# Altium PCB LED_PCB.PcbDoc (part 3 of 4)
Units mil, origin at the board's own origin, x right, y up, seen from the top; angles counter-clockwise.
Board outline 8000 x 4000 mil, 2 copper layers (Top Layer, Bottom Layer); 187 components, 303 nets, 1415 pads, 387 vias.
Unrouted connection lines stored in the file: 1.
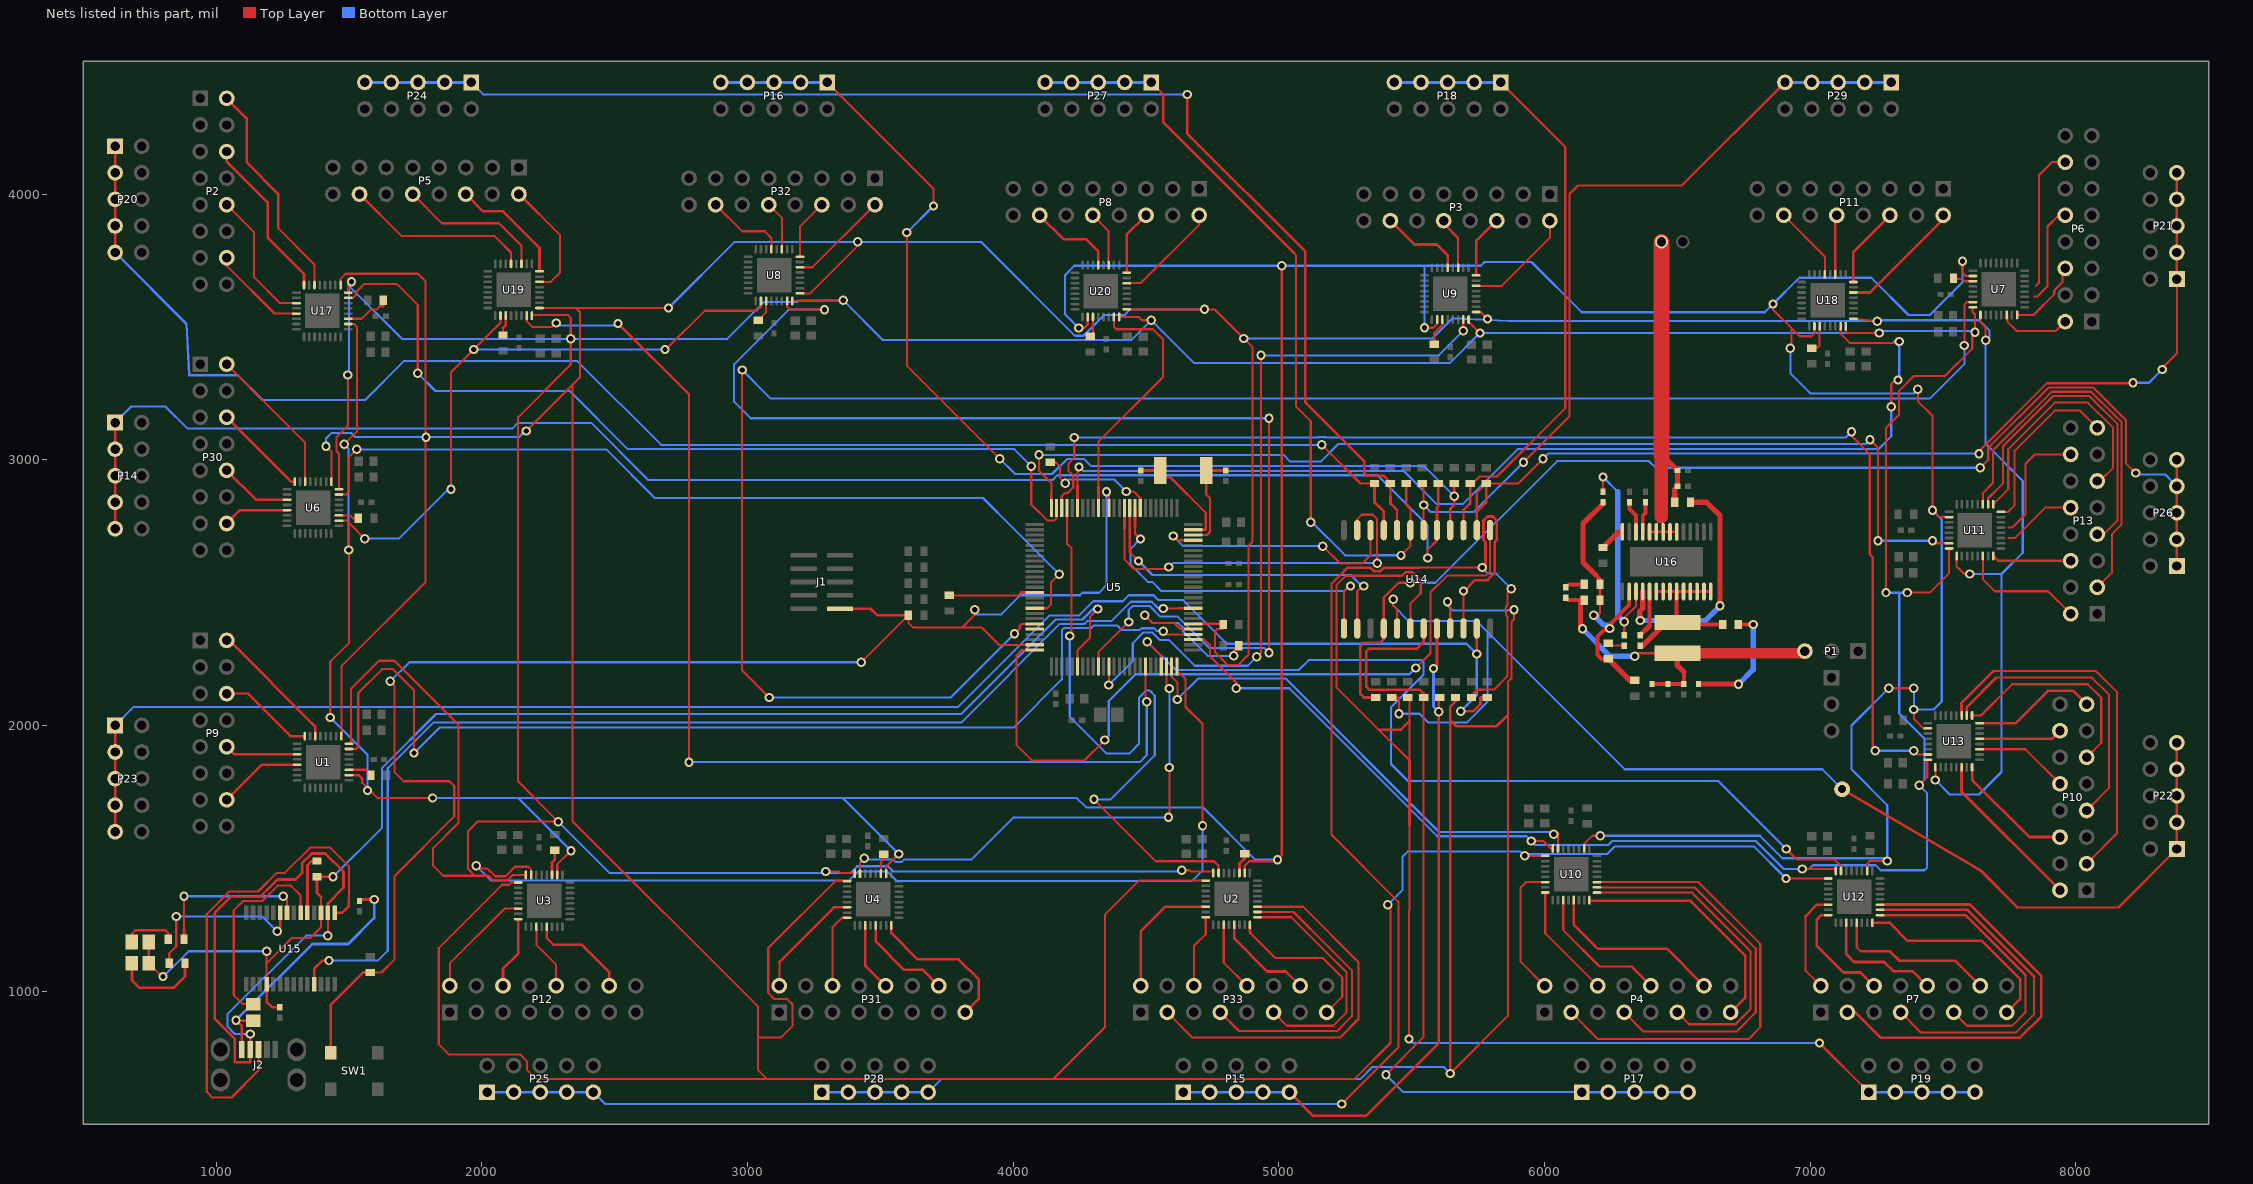
[diagram p3: the nets of this part, all layers, seen from the top]

## Via types
v1: diameter 35, hole 20, Top Layer to Bottom Layer, 371 vias
v2: diameter 25.98, hole 12.99, Top Layer to Bottom Layer, tented top, 12 vias
v3: diameter 89, hole 89, Top Layer to Bottom Layer, 4 vias

## Nets (pads, with @x,y where several pads share a name; then routed paths per layer and width w, separated by ;. In a path a pad name is that pad's centre, name@x,y a point inside that pad or via, vN(x,y) a via of type N, cw(c..) or ccw(c..) an arc to the next point about the centre after c; other vN are vias at no path point) (continued)
LED_GREEN_43: P31.15 U4.16 | length 575.1
  Top Layer w10: U4.16@3541.65,1247.56 3541.65,1218.35 3640,1120 3795,1120 3870,1045 3870,970 P31.15@3820,920
LED_GREEN_44: P33.3 U2.19 | length 1516.9
  Top Layer w8: P33.3@4580,920 4675,825 5230,825 5300,895 5300,1109.01 5091.3,1317.72 4967.29,1317.72 U2.19@4919.69,1317.72
  Top Layer w10: U2.19@4919.69,1318.03 4966.97,1318.03 4967.29,1317.72
LED_GREEN_45: P33.7 U2.18 | length 1166.4
  Top Layer w8: P33.7@4780,920 4850,850 5220,850 5275,905 5275,1078.28 5188.28,1165 5055.25,1298.03 4956.97,1298.03 U2.18@4919.69,1298.03
LED_GREEN_46: P33.11 U2.17 | length 888
  Top Layer w8: U2.17@4919.69,1278.35 5046.65,1278.35 5180,1145 5255,1070 5255,920 5205,870 5030,870 P33.11@4980,920
LED_GREEN_47: P33.15 U2.16 | length 632.6
  Top Layer w8: U2.16@4891.14,1249.8 4891.14,1220.13 4891.38,1219.89 4986.34,1124.93 5165.07,1124.93 5235,1055 5238.53,1051.47 5238.53,978.53 P33.15@5180,920
  Top Layer w10: 4891.38,1219.89 U2.16@4891.38,1249.8
LED_GREEN_48: P4.3 U10.19 | length 1796.5
  Top Layer w8: P4.3@6100,920 6200,820 6768,820 6812,864 6812,1178 6579.53,1410.47 U10.19@6197.44,1410.47
LED_GREEN_49: P4.7 U10.18 | length 1487.8
  Top Layer w8: U10.18@6197.44,1390.79 6564.21,1390.79 6795,1160 6795,920 6723,848 6372,848 P4.7@6300,920
LED_GREEN_50: P4.11 U10.17 | length 1204
  Top Layer w8: U10.17@6197.44,1371.1 6553.9,1371.1 6775,1150 6775,932.03 6718.44,875.47 6544.53,875.47 P4.11@6500,920
LED_GREEN_51: P4.15 U10.16 | length 911.4
  Top Layer w10: U10.16@6168.9,1342.56 6168.9,1340 6550,1340 6755,1135 6755,975 P4.15@6700,920
LED_GREEN_52: P7.3 U12.19 | length 1671
  Top Layer w8: U12.19@7262.44,1325.47 7281,1325.47
  Top Layer w10: P7.3@7140,920 7170,920 7265,825 7790,825 7870,905 7870,1056.57 7600.7,1325.87 7283.13,1325.87
LED_GREEN_53: P7.7 U12.18 | length 2072.1
  Top Layer w8: U12.18@7262.44,1305.79 7592.5,1305.79 7842.5,1055.78 7842.5,912.5 7775,845 7415,845 P7.7@7340,920
  Top Layer w10: U12.18@7262.44,1305.87 7592.42,1305.87 7592.5,1305.79 7842.5,1055.78
LED_GREEN_54: P7.11 U12.17 | length 1733.7
  Top Layer w8: U12.17@7262.44,1286.1 7583.9,1286.1 7584.13,1285.87 7810,1060 7810,920 7760,870 7590,870 P7.11@7540,920
  Top Layer w10: U12.17@7262.44,1285.87 7584.13,1285.87 7810,1060
LED_GREEN_55: P7.15 U12.16 | length 789.9
  Top Layer w10: U12.16@7233.9,1257.56 7297.44,1257.56 7365,1190 7645,1190 7790,1045 7790,970 P7.15@7740,920
LED_GREEN_56: P10.3 U13.19 | length 1625.8
  Top Layer w8: U13.19@7569.53,2037.44 7569.53,2084.53 7690,2205 8075,2205 8155,2125 8155,1595 P10.3@8040,1480
  Top Layer w10: U13.19@7569.21,2037.44 7569.21,2084.21 7569.53,2084.53 7690,2205
LED_GREEN_57: P10.7 U13.18 | length 1299
  Top Layer w8: U13.18@7589.21,2037.44 7589.21,2069.21 7700,2180 8060,2180 8125,2115 8125,1765 P10.7@8040,1680
  Top Layer w10: U13.18@7589.21,2037.44 7589.21,2069.21 7700,2180
LED_GREEN_58: P10.11 U13.17 | length 803.5
  Top Layer w8: U13.17@7608.9,2037.44 7642.44,2037.44 7760,2155 8045,2155 8095,2105 8095,1935 8065,1905 P10.11@8040,1880
  Top Layer w10: U13.17@7608.9,2037.44 U13.17@7609.13,2037.44
LED_GREEN_59: P10.15 U13.16 | length 473.4
  Top Layer w10: U13.16@7637.44,2008.9 7773.9,2008.9 7895,2130 7990,2130 P10.15@8040,2080
LED_GREEN_60: P13.3 U11.19 | length 1503.1
  Top Layer w8: U11.19@7649.53,2832.44 7649.53,2874.53 7687.37,2912.37 7687.37,3035 7908.37,3256 8056.63,3256 8143.53,3169.1 8144.1,3169.1 8145,3170 8145,3167.63 8172,3140.63 8172,2758.69 8170,2756.69 8170,2755 8135,2720 8135,2575 P13.3@8080,2520
LED_GREEN_61: P13.7 U11.18 | length 1254.4
  Top Layer w8: U11.18@7669.21,2832.44 7669.21,2854.21 7725,2910 7725,3050 7915,3240 8050,3240 8155,3135 8156,3134 8156,2771 8105,2720 P13.7@8080,2720
LED_GREEN_62: P13.11 U11.17 | length 968.3
  Top Layer w8: U11.17@7688.9,2832.44 7745,2888.54 7745,3040 7920,3215 8045,3215 8140,3120 8140,2970 8090,2920 P13.11@8080,2920
LED_GREEN_63: P13.15 U11.16 | length 667.5
  Top Layer w8: U11.16@7717.44,2803.9 7744,2803.9 7769,2828.9 7769,3034 7920,3185 8015,3185 P13.15@8080,3120
LED_MODE: U1.26 U2.26 U3.26 U4.26 U6.26 U7.26 U8.26 U9.26 U10.26 U11.26 U12.26 U13.26 U17.26 U18.26 U19.26 U20.26 | length 20336
  Top Layer w8: v1(1430,2030) 1430,2240 1500,2310 v1(1500,2660) ; U6.26@1462.44,2770.79 1492,2770.79 1499,2763.79 ; v1(1483,3058) 1530,3105 1530,3500.79 1520,3510.79 U17.26@1497.44,3510.79 ; v1@1499,2660 1499,2763.79 ; U1.26@1500.2,1813.03 1521.97,1813.03 ; 1550,1785 1608.36,1726.64 v1(1815,1726.64) ; v1(1559.79,2703) 1499,2763.79 ; v1(1884,2889) 1884,3329.21 2070.79,3516 U19.26@2070.79,3542.56 ; U3.26@2284.21,1437.44 2284.21,1477 v1(2336,1528.79) ; v1(2690,3415) 2693,3415 2839,3561 3035,3561 3050.79,3576.79 U8.26@3050.79,3597.56 ; U4.26@3521.97,1442.44 3521.97,1469 v1(3569,1516.03) ; v1(4247,3496) 4267.79,3496 4280.79,3509 U20.26@4280.79,3537.56 ; U2.26@4871.46,1444.68 4871.46,1472 4888.46,1489 4989,1489 v1(4995,1495) 5011,1511 v1(5011,3730) ; v1(5548,3497) 5580,3497 5582,3499 5584,3499 5595.79,3510.79 U9.26@5595.79,3527.56 ; U10.26@6149.21,1537.44 6149.21,1554.21 6180,1585 v1(6210,1585) ; v1@6860,3570 6860,3565 6930,3495 ; v1(6925,3420) 6930,3425 6930,3495 ; U18.26@7015.79,3502.56 7015.79,3475.79 7005,3465 6960,3465 6930,3495 ; U12.26@7214.21,1452.44 7214.21,1479.21 7225,1490 v1(7290,1490) ; v1(7295,2140) v1(7390,2140) ; v1(7390,2060) 7390,2025 7425.79,1989.21 U13.26@7442.56,1989.21 ; v1(7405,3265) 7405,3220 7460,3165 v1(7460,2810) 7485.79,2784.21 U11.26@7522.56,2784.21 ; v1(7573,3747) 7573,3703.65 7585,3691.65 U7.26@7612.09,3691.65
  Top Layer w10: 1521.97,1813.03 1536.97,1813.03 1550,1800 1550,1785
  Bottom Layer w8: v1(1430,2030) 1570,1890 v1(1570,1755) ; v1(1483,3058) 1499,3042 v1@1499,2660 ; v1(1559.79,2703) 1688,2703 1874,2889 v1(1884,2889) ; v1@1824.64,1717 v1(1815,1726.64) 2138.15,1726.64 ; v1(1970,3415) v1(2690,3415) ; v1(2336,1528.79) 2138.15,1726.64 ; 3360.02,1725.02 v1(3569,1516.03) ; v1(4247,3496) 4195,3548 4195,3695 4230,3730 v1(5011,3730) 5760,3730 5774.23,3744.23 5950.77,3744.23 6140,3555 6829,3555 v1(6860,3586) 6959,3685 7230,3685 7370,3545 7450,3545 7573,3668 v1(7573,3747) ; v1(4995,1495) 4911,1495 4714.49,1691.51 4274.49,1691.51 4239.36,1726.64 2138.15,1726.64 ; v1(5548,3497) 5548,3727 ; v1(6210,1585) 6810,1585 6895,1500 7280,1500 v1(7290,1490) 7290,1700 7155,1835 7155,2000 v1(7295,2140) ; v1(6925,3420) 6925,3325 7000,3250 7390,3250 v1(7405,3265) ; v1(7390,2140) v1(7390,2060) 7465,2060 7495,2090 7495,2775 v1(7460,2810)
LED_RED_0: P2.2 U17.6 | length 1075.5
  Top Layer w8: P2.2@1040,4360 1115,4285 ; 1233.99,4001.01 1233.99,3871.01 1370.47,3734.53 U17.6@1370.47,3657.44
  Top Layer w10: P2.2@1040,4360 1115,4285 1115,4120 1233.99,4001.01 1233.99,3871.01
LED_RED_1: P2.6 U17.8 | length 991.3
  Top Layer w8: 1193.99,3968.99 1193.99,3836.01 1330.79,3699.21 1331.1,3698.9 U17.8@1331.1,3657.44
  Top Layer w10: P2.6@1040,4160 1040,4122.97 1193.99,3968.99 1193.99,3836.01 1330.79,3699.21 U17.8@1330.79,3657.44
LED_RED_2: P2.10 U17.11 | length 515.6
  Top Layer w8: P2.10@1040,3960 1143.53,3856.47 1143.53,3686.47 1240.47,3589.53 U17.11@1302.56,3589.53
LED_RED_3: P2.14 U17.13 | length 366.9
  Top Layer w8: P2.14@1040,3760 1040,3730.32 1220.16,3550.16 U17.13@1302.56,3550.16
LED_RED_4: P5.2 U19.6 | length 451.5
  Top Layer w8: P5.2@2140,4000 2295,3845 2295,3780 2295,3705 2259.53,3669.53 U19.6@2217.44,3669.53
LED_RED_5: P5.6 U19.8 | length 450
  Top Layer w10: P5.6@1940,4000 2005,3935 2080,3935 2217.44,3797.56 U19.8@2217.44,3708.9
LED_RED_6: P5.10 U19.11 | length 558.1
  Top Layer w8: P5.10@1740,4000 1850,3890 2065,3890 2149.53,3805.47 U19.11@2149.53,3737.44
LED_RED_7: P5.14 U19.13 | length 703.8
  Top Layer w8: P5.14@1540,4000 1698.5,3841.5 2048.66,3841.5 2055.16,3835 2110.16,3780 U19.13@2110.16,3737.44
LED_RED_8: P8.2 U20.6 | length 398.9
  Top Layer w8: U20.6@4427.44,3664.53 4479.53,3664.53 4700,3885 P8.2@4700,3920
LED_RED_9: P8.6 U20.8 | length 246.2
  Top Layer w10: U20.8@4427.44,3703.9 4427.44,3847.44 P8.6@4500,3920
LED_RED_10: P8.10 U20.11 | length 212.2
  Top Layer w8: P8.10@4300,3920 4359.53,3860.47 U20.11@4359.53,3732.44
LED_RED_11: P8.14 U20.13 | length 335.9
  Top Layer w10: P8.14@4100,3920 4190,3830 4275,3830 4320.16,3784.84 U20.13@4320.16,3732.44 U20.13@4320.16,3739.84
LED_RED_12: P11.2 U18.6 | length 513.8
  Top Layer w8: U18.6@7162.44,3629.53 7209.53,3629.53
  Top Layer w10: U18.6@7162.44,3629.53 7209.53,3629.53 7224.53,3629.53 7500,3905 P11.2@7500,3920
LED_RED_13: P11.6 U18.8 | length 308.1
  Top Layer w10: U18.8@7162.44,3668.9 7162.44,3782.44 P11.6@7300,3920
LED_RED_14: P11.10 U18.11 | length 224.8
  Top Layer w10: U18.11@7094.53,3697.44 7094.53,3914.53 P11.10@7100,3920
LED_RED_15: P11.14 U18.13 | length 286.8
  Top Layer w8: P11.14@6900,3920 7055.16,3764.84 U18.13@7055.16,3697.44
LED_RED_16: P30.2 U6.6 | length 575.9
  Top Layer w8: P30.2@1040,3360 1335.47,3064.53 1335.47,3053.58 U6.6@1335.47,2917.44
  Top Layer w10: P30.2@1040,3349.06 P30.2@1040,3360
LED_RED_17: P30.6 U6.8 | length 356.6
  Top Layer w10: P30.6@1040,3160 1282.56,2917.44 U6.8@1296.1,2917.44
LED_RED_18: P30.10 U6.11 | length 273.3
  Top Layer w10: P30.10@1040,2960 1150.47,2849.53 U6.11@1267.56,2849.53
LED_RED_19: P30.14 U6.13 | length 248.3
  Top Layer w10: P30.14@1040,2760 1090.16,2810.16 U6.13@1267.56,2810.16
LED_RED_20: P32.2 U8.6 | length 385.1
  Top Layer w8: U8.6@3197.44,3724.53 3244.53,3724.53 P32.2@3480,3960
  Top Layer w10: P32.2@3480,3955 P32.2@3480,3960
LED_RED_21: P32.6 U8.8 | length 238.6
  Top Layer w8: U8.8@3197.44,3763.9 3197.44,3869.16 3197.44,3877.44 P32.6@3280,3960
  Top Layer w10: P32.6@3280,3951.72 P32.6@3280,3960
LED_RED_22: P32.10 U8.11 | length 188.1
  Top Layer w8: P32.10@3080,3960 3129.53,3910.47 U8.11@3129.53,3792.44
LED_RED_23: P32.14 U8.13 | length 304.4
  Top Layer w8: P32.14@2880,3960 2980,3860 3065,3860 3090.16,3834.84 U8.13@3090.16,3792.44
LED_RED_24: P3.2 U9.6 | length 417.3
  Top Layer w8: U9.6@5742.44,3654.53 5839.53,3654.53 6020,3835 P3.2@6020,3900
LED_RED_25: P3.6 U9.8 | length 238.2
  Top Layer w10: U9.8@5742.44,3693.9 5742.44,3822.44 P3.6@5820,3900
LED_RED_26: P3.10 U9.11 | length 200.1
  Top Layer w8: P3.10@5620,3900 5620,3889.06 5674.53,3834.53 U9.11@5674.53,3722.44
LED_RED_27: P3.14 U9.13 | length 316.7
  Top Layer w10: P3.14@5420,3900 5510,3810 5595.32,3810 5635.16,3770.16 U9.13@5635.16,3722.44
LED_RED_28: P6.2 U7.6 | length 273.6
  Top Layer w8: U7.6@7739.06,3545 7741.82,3542.24 7741.82,3519.55 7776.43,3484.94 7924.94,3484.94 P6.2@7960,3520
LED_RED_29: P6.6 U7.8 | length 286.3
  Top Layer w8: U7.8@7778.43,3545 7840,3545 7918.47,3623.47 7918.47,3637.2 7950,3668.73 7950,3710 P6.6@7960,3720
LED_RED_30: P6.10 | length 375.3
  Top Layer w8: 7843,3615 7855.25,3615 7893,3652.75 7893,3878 7935,3920 P6.10@7960,3920
LED_RED_31: P6.14 | length 539.9
  Top Layer w8: 7850,3655 7861,3666 7861,4071 7910,4120 P6.14@7960,4120
LED_RED_32: P9.2 U1.6 | length 504.2
  Top Layer w10: P9.2@1040,2320 1050,2320 1373.23,1996.77 U1.6@1373.23,1959.68
LED_RED_33: P9.6 U1.8 | length 360.3
  Top Layer w8: P9.6@1040,2120 1120,2120
  Top Layer w10: 1120,2120 1280.32,1959.68 U1.8@1333.86,1959.68
LED_RED_34: P9.10 U1.11 | length 277
  Top Layer w10: P9.10@1040,1920 1068.23,1891.77 U1.11@1305.32,1891.77
LED_RED_35: P9.14 U1.13 | length 320.2
  Top Layer w10: P9.14@1040,1720 1172.4,1852.4 U1.13@1305.32,1852.4
LED_RED_36: P12.2 U3.6 | length 427.7
  Top Layer w8: P12.2@1880,1020 1880,1105 2085.47,1310.47 U3.6@2137.56,1310.47
LED_RED_37: P12.6 U3.8 | length 339.9
  Top Layer w8: P12.6@2080,1020 2080,1085
  Top Layer w10: P12.6@2080,1020 2080,1085 2137.56,1142.56 U3.8@2137.56,1271.1
LED_RED_38: P12.10 U3.11 | length 253.4
  Top Layer w8: U3.11@2205.47,1242.56 2205.47,1174.53 2280,1100 P12.10@2280,1020
LED_RED_39: P12.14 U3.13 | length 436.5
  Top Layer w8: U3.13@2244.84,1242.56 2244.84,1200.16 2270,1175 2325,1175
  Top Layer w10: 2270,1175 2325,1175 2375,1175 2480,1070 P12.14@2480,1020
LED_RED_40: P31.2 U4.6 | length 770.9
  Top Layer w8: P31.2@3120,1020 3120,1110 3325.47,1315.47 U4.6@3375.32,1315.47
  Top Layer w10: 3120,1110 3325.47,1315.47 U4.6@3375.32,1315.47
LED_RED_41: P31.6 U4.8 | length 290.3
  Top Layer w8: P31.6@3320,1020 3320,1240 3356.1,1276.1 U4.8@3375.32,1276.1
LED_RED_42: P31.10 U4.11 | length 410.1
  Top Layer w10: P31.10@3520,1020 3443.23,1096.77 ; 3443.23,1096.77 U4.11@3443.23,1247.56 3443.23,1096.77
LED_RED_43: P31.14 U4.13 | length 367.3
  Top Layer w10: U4.13@3482.6,1247.56 3483.23,1247.56 3483.23,1186.77 3590,1080 3660,1080 P31.14@3720,1020
LED_RED_44: P33.2 U2.6 | length 799
  Top Layer w8: P33.2@4480,1020 4480,1212 ; 4585.72,1317.72 U2.6@4724.8,1317.72
  Top Layer w10: P33.2@4480,1020 4480,1212 4480,1225 4572.72,1317.72 4704.51,1317.72
LED_RED_45: P33.6 U2.8 | length 276.9
  Top Layer w8: P33.6@4680,1020 4680,1170 4724.8,1214.8 U2.8@4724.8,1278.35
LED_RED_46: P33.10 U2.11 | length 266
  Top Layer w8: U2.11@4792.72,1249.8 4792.72,1107.28 P33.10@4880,1020
LED_RED_47: P33.14 U2.13 | length 445.1
  Top Layer w8: 4955,1072.93 5027.07,1072.93 P33.14@5080,1020
  Top Layer w10: 4832.09,1197.91 U2.13@4832.09,1249.8 ; 4832.4,1197.6 4956.07,1073.93 5026.07,1073.93 5027.07,1072.93
LED_RED_48: P4.2 U10.6 | length 508.3
  Top Layer w8: P4.2@6000,1020 5910,1110 5910,1390 5930,1410 5930.47,1410.47 5965.47,1410.47 U10.6@6002.56,1410.47
LED_RED_49: P4.6 U10.8 | length 432.9
  Top Layer w8: U10.8@6002.56,1371.1 6002.56,1217.44 P4.6@6200,1020
LED_RED_50: P4.10 U10.11 | length 628.3
  Top Layer w8: U10.11@6070.47,1342.56 6070.47,1229.53 6207,1093 6327,1093 6330,1090 P4.10@6400,1020
  Top Layer w10: 6330,1090 P4.10@6400,1020
LED_RED_51: P4.14 U10.13 | length 677.9
  Top Layer w10: U10.13@6109.84,1342.56 6109.84,1250.16 6200,1160 6460,1160 P4.14@6600,1020
LED_RED_52: P7.2 U12.6 | length 406.7
  Top Layer w8: 6981.5,1078.5 6981.5,1281.5 ; 6983,1077 P7.2@7040,1020 ; 7028.47,1325.47 U12.6@7067.56,1325.47
  Top Layer w10: 6981.5,1281.5 7025.47,1325.47 7047.26,1325.47
LED_RED_53: P7.6 U12.8 | length 426.4
  Top Layer w10: U12.8@7067.56,1286.1 7041.1,1286.1 7025,1270 7025,1170 7125,1070 7190,1070 P7.6@7240,1020
LED_RED_54: P7.10 U12.11 | length 538.8
  Top Layer w10: U12.11@7135.47,1257.56 7135.47,1140 7165.47,1110 7278.28,1110 7313.28,1075 7385,1075 ; 7318.03,1075 7385,1075 ; P7.10@7440,1020 7385,1075
LED_RED_55: P7.14 U12.13 | length 752
  Top Layer w8: U12.13@7174.84,1257.56 7174.84,1165.16 7190,1150 7300,1150 ; 7545,1115 P7.14@7640,1020
  Top Layer w10: 7300,1150 7335,1115 7545,1115 P7.14@7640,1020
LED_RED_56: P10.2 U13.6 | length 616
  Top Layer w10: U13.6@7569.53,1842.56 7569.53,1750.47 P10.2@7940,1380
LED_RED_57: P10.6 U13.8 | length 467.4
  Top Layer w10: U13.8@7608.9,1842.56 7609.53,1842.56 7609.53,1795.47 7825,1580 P10.6@7940,1580
LED_RED_58: P10.10 U13.11 | length 356.6
  Top Layer w8: U13.11@7637.44,1910.47 7669.53,1910.47 7809.53,1910.47 P10.10@7940,1780
LED_RED_59: P10.14 U13.13 | length 315
  Top Layer w10: U13.13@7637.44,1949.84 7909.84,1949.84 P10.14@7940,1980
LED_RED_60: P13.2 U11.6 | length 471.6
  Top Layer w8: U11.6@7649.53,2637.56 7649.53,2550.47 7695,2505 7895,2505 P13.2@7980,2420
LED_RED_61: P13.6 U11.8 | length 298.4
  Top Layer w10: U11.8@7688.9,2637.56 7689.53,2637.56 7707.09,2620 P13.6@7980,2620
LED_RED_62: P13.10 | length 281.5
  Top Layer w8: 7746.17,2705 7770,2705 7885,2820 P13.10@7980,2820
LED_RED_63: P13.14 | length 459
  Top Layer w8: 7746.17,2745 7760,2745 7810,2795 7810,2985 7845,3020 P13.14@7980,3020
MUX_A: U5.47 U14.10 | length 970.8
  Top Layer w8: v1(4602,2713.17) 4618,2697.17 U5.47@4678.23,2697.17 ; v1(5165,2675) 5230,2610 5315,2610 5345,2640 U14.10@5345,2735.04
  Bottom Layer w8: v1(4602,2713.17) 4640.17,2675 5147,2675 v1@5156,2666
MUX_B: U5.61 U14.11 | length 1541.1
  Top Layer w8: U5.61@4419.37,2818.23 4419.37,2624 4454.37,2589 4579,2589 v1(4586,2596) ; U14.11@5295,2735.04 5295,2776 5312,2793 5353,2793 5370,2776 v1(5370,2611)
  Top Layer w10: 4419.37,2740.63 U5.61@4419.37,2818.23
  Bottom Layer w8: v1(4586,2596) 4601,2611 v1(5370,2611)
MUX_C: U5.60 U14.14 | length 1350.6
  Top Layer w8: U5.60@4439.06,2818.23 4439.06,2651.94 v1(4472,2619) ; U14.14@5295,2364.96 5295,2505 5306,2516 v1(5320,2525)
  Top Layer w10: 4439.06,2740.94 U5.60@4439.06,2818.23
  Bottom Layer w8: v1(4472,2619) 4524.5,2566.5 5272.36,2566.5 5272.36,2564.36 5311.72,2525 v1(5320,2525)
MUX_D: U5.59 U14.13 | length 1359.1
  Top Layer w8: U5.59@4458.74,2818.23 4458.74,2722.26 v1(4479,2702) ; U14.13@5245,2364.96 5245,2505 5265,2525 v1(5270,2525)
  Top Layer w10: 4458.74,2746.26 U5.59@4458.74,2818.23
  Bottom Layer w8: v1(4479,2702) 4442,2665 4442,2605 4506.5,2540.5 4523.04,2540.5 4557.54,2506 5246,2506 5265,2525 v1(5270,2525)
NetC17_2: C17.2 U5.48 XTAL1.1 | length 378.9
  Top Layer w8: U5.48@4678.23,2716.85 4729.85,2716.85 4741,2728 4741,2854.6 4726.61,2868.99 XTAL1.1@4726.61,2960
  Top Layer w10: XTAL1.1@4726.61,2960 4763,2960 4763.31,2959.69 C17.2@4800,2959.69
NetC18_2: C18.2 U5.49 XTAL1.2 | length 437.5
  Top Layer w8: XTAL1.2@4553.39,2960 4553.39,2933 4592,2933 4725,2800 4725,2736.54 U5.49@4678.23,2736.54
  Top Layer w10: C18.2@4480,2959.69 4516,2959.69 4516.31,2960 XTAL1.2@4553.39,2960
NetC46_2: C46.2 J2.1 L2.1 | length 972.3
  Top Layer w10: v1(1075,890) v1@1076.5,888.5 ; J2.1@1097.01,780 1097.01,867.99 v1@1076.5,888.5 ; L2.1@1140,888.5 v1@1076.5,888.5 ; C46.2@1540,1339.69 1545.31,1345 v1(1595,1345)
  Bottom Layer w10: v1@1087,902 1362.54,1177.54 1497.54,1177.54 1595,1275 v1(1595,1345)
NetC50_1: C50.1 U16.26 | length 156.1
  Top Layer w8: U16.26@6343.98,2728.58 6343.98,2763.02
  Top Layer w15: C50.1@6320,2840.32 6320,2815 6343.98,2791.02 U16.26@6343.98,2728.58
NetC51_1: C51.1 U16.25 | length 116.1
  Top Layer w15: U16.25@6369.57,2728.58 6369.57,2789.57 6380,2800 C51.1@6380,2840.32
NetC52_1: C52.1 C54.2 C55.2 C56.2 L3.2 P1.3 R46.2 | length 1370.6
  Top Layer w8: C52.1@6080,2480.32 C52.1@6088.94,2471.38 ; v1(6143,2364) v1@6149.61,2370.61 ; v1@6340,2271.75 L3.2@6500,2271.75 L3.2@6558,2271.75 ; P1.3@6971.75,2271.75 P1.3@6980,2280
  Top Layer w15: C52.1@6088.94,2471.38 R46.2@6149.61,2471.38 ; C54.2@6404.13,2156.06 C55.2@6464.13,2156.06 C56.2@6524.13,2156.06 6524.13,2201
  Top Layer w20: v1@6135,2370 6135,2470.77 ; L3.2@6500,2271.75 6500,2225.13 6524.13,2201
  Top Layer w40: L3.2@6500,2271.75 P1.3@6971.75,2271.75
  Bottom Layer w20: v1(6143,2364) 6247,2260 v1(6340,2260)
NetC52_2: C52.2 R43.2 | length 74.4
  Top Layer w8: C52.2@6080,2519.69 6091.69,2531.38
  Top Layer w15: 6091.69,2531.38 R43.2@6149.61,2531.38
NetC53_1: C53.1 C57.1 U16.3 | length 816.2
  Top Layer w8: C57.1@6220,2879.68 v1(6220,2935) ; C53.1@6300,2339.68 v1(6300,2390) 6300,2405 6343.98,2448.98 U16.3@6343.98,2504.17
  Bottom Layer w8: v1(6220,2935) 6275,2880
  Bottom Layer w20: 6275,2880 6275,2415 v1(6300,2390)
NetC53_2: C53.2 R44.1 | length 63.8
  Top Layer w8: R44.1@6240,2309.53 6249.21,2300.31 C53.2@6300,2300.31
NetC57_2: C57.2 R43.1 R44.2 R46.1 R47.2 U16.2 | length 1066.7
  Top Layer w8: v1(6185,2415) 6198.28,2415 6203,2419.72 6204.72,2419.72 6210,2425 6208.66,2426.34 R46.1@6208.66,2471.38 R46.1@6208.5,2471.22 ; 6214.53,2250.47 R44.2@6240,2250.47 ; v1@6240,2375 6245,2375 v1(6245,2365) ; 6320.94,2169.53 R47.2@6340,2169.53
  Top Layer w10: R46.1@6208.66,2471.38 R43.1@6208.66,2531.38
  Top Layer w15: 6192.66,2566 6208.66,2550 ; 6214.53,2250.47 6200,2265 6200,2335 6240,2375 6318.39,2453.39 U16.2@6318.39,2504.17
  Top Layer w20: 6192.66,2566 6145,2613.66 6145,2760 C57.2@6222.66,2837.66 ; R44.2@6240,2250.47 6320.94,2169.53
  Bottom Layer w8: v1(6245,2365) v1@6245,2377.72
  Bottom Layer w20: v1(6185,2415) 6198.28,2415 6191.64,2408.36 6222.28,2377.72 v1@6245,2377.72
NetC58_1: C58.1 U16.5 | length 179.5
  Top Layer w8: 6395,2375 6395.32,2375 ; 6395,2434.68 6395.16,2434.84
  Top Layer w15: 6395,2375 6395,2434.68 ; 6395.16,2434.84 U16.5@6395.16,2504.17
  Top Layer w20: C58.1@6360,2339.68 6395.32,2375
NetC58_2: C58.2 L3.1 R45.2 U16.6 U16.7 U16.8 U16.9 U16.10 U16.11 U16.12 U16.13 U16.14 | length 712.2
  Top Layer w8: C58.2@6360,2300.31 6370.31,2300.31 ; L3.1@6458.25,2388.25 6497.52,2388.25 L3.1@6500,2388.25 L3.1@6540,2388.25 ; L3.1@6548.25,2380 L3.1@6540,2388.25 ; L3.1@6581.28,2388.25 L3.1@6540,2388.25
  Top Layer w10: U16.6@6420.75,2504.17 U16.7@6446.34,2504.17 U16.8@6471.93,2504.17 U16.9@6497.52,2504.17 U16.10@6523.11,2504.17 U16.11@6548.7,2504.17 U16.12@6574.29,2504.17 U16.13@6599.88,2504.17 U16.14@6625.47,2504.17
  Top Layer w15: L3.1@6497.52,2388.25 U16.9@6497.52,2504.17 ; L3.1@6548.25,2380 R45.2@6670.47,2380
  Top Layer w20: 6370.31,2300.31 L3.1@6458.25,2388.25
NetC59_2: C59.2 R45.1 | length 454.6
  Top Layer w8: v1@6728.94,2156.06 v1(6730,2155)
  Top Layer w15: R45.1@6729.53,2380 v1(6785,2380)
  Top Layer w20: C59.2@6579.13,2156.06 v1@6728.94,2156.06
  Bottom Layer w20: v1(6730,2155) 6785,2210 v1(6785,2380)
NetD1_2: D1.2 R38.2 | length 343.7
  Top Layer w10: D1.2@683.5,1105 683.5,1040 711.22,1012.28 840.26,1012.28 883.03,1055.06 R38.2@883.03,1105
NetD2_2: D2.2 R39.2 | length 201.5
  Top Layer w8: D2.2@683.5,1185 683.5,1216.5 696,1229 810,1229 820.47,1218.53 R39.2@820.47,1195
NetD3_3: R40.2 U15.19 | length 221.7
  Top Layer w10: U15.19@1343.98,1294.45 1343.98,1473.5 1360,1489.53 R40.2@1380,1489.53
NetL2_2: L2.2 U15.20 | length 778
  Top Layer w8: L2.2@1140,951.5 1100,951.5 1066.5,985 1066.5,1304.13 1101.79,1339.42 1175,1339.42 1175,1339.81 1232.19,1397 1281.39,1397 1318.39,1360 U15.20@1318.39,1294.45
NetR1_2: R1.2 U2.27 | length 119.1
  Top Layer w8: U2.27@4851.77,1444.68 4851.77,1470.27 4852.09,1470.59 4853.68,1472.18 4853.68,1481.6
  Top Layer w10: U2.27@4852.09,1444.68 4852.09,1470.59 4852.09,1480 4853.68,1481.6 4872.24,1500.16 R1.2@4872.24,1517.72
NetR2_2: R2.2 U1.27 | length 91.5
  Top Layer w10: U1.27@1500.2,1832.72 1562.76,1832.72 R2.2@1583.23,1812.24
NetR3_2: R3.2 U3.27 | length 97.4
  Top Layer w10: U3.27@2264.53,1437.44 2264.53,1484.53 2275,1495 R3.2@2275,1530.47
NetR4_2: R4.2 U4.27 | length 77.4
  Top Layer w8: U4.27@3502.28,1442.44 3502.28,1485.19 3512.76,1495.66 R4.2@3512.76,1515.47
NetR12_1: R12.1 U5.58 | length 505.7
  Top Layer w8: R12.1@4140,2990.47 4160,2990.47 4177.02,2973.45 4177.02,2930.98 v1(4196,2912) ; v1(4426,2880.5) 4453.93,2880.5 4478.43,2856 U5.58@4478.43,2818.23
  Top Layer w10: U5.58@4478.43,2818.23 4478.43,2856
  Bottom Layer w8: v1(4196,2912) 4209.5,2925.5 4381,2925.5 v1(4426,2880.5)
NetR13_2: R13.2 U7.27 | length 78.5
  Top Layer w8: R13.2@7539.06,3682.44 7539.06,3680.57 7571.87,3680.57 7580.47,3671.97 U7.27@7612.09,3671.97
NetR14_2: R14.2 U6.27 | length 77.4
  Top Layer w8: U6.27@1462.44,2790.47 1505.19,2790.47 1515.66,2780 R14.2@1535.47,2780
NetR15_2: R15.2 U8.27 | length 85.7
  Top Layer w8: R15.2@3040,3524.53 3070.16,3554.69 3070.47,3555 U8.27@3070.47,3597.56
NetR16_2: R16.2 U9.27 | length 105.7
  Top Layer w8: R16.2@5585,3434.53 5585,3476.79 5615.47,3507.26 U9.27@5615.47,3527.56
NetR17_2: 
NetR17_2: 
NetR17_2: 
NetR17_2: 
NetR18_2: 
NetR18_2: 
NetR18_2: 
NetR18_2: 
NetR19_2: 
NetR19_2: 
NetR19_2: 
NetR19_2: 
NetR20_2: 
NetR20_2: 
NetR20_2: 
NetR20_2: 
NetR34_2: R34.2 U5.89 | length 378.2
  Top Layer w8: R34.2@3760,2489.53 4019.05,2489.53 4029.84,2500.31 U5.89@4081.77,2500.31
  Top Layer w10: 4029.84,2500.31 U5.89@4081.77,2500.31
NetR38_1: R38.1 U15.23 | length 673.5
  Top Layer w8: R38.1@823.98,1105 823.98,1142 850,1168.02 850,1272 v1(850,1281) ; v1(1230,1225) 1241.61,1236.61 U15.23@1241.61,1294.45
  Top Layer w10: v1@841,1281 v1@850,1272
  Bottom Layer w8: v1(850,1281) 1174,1281 v1@1227.52,1227.48
NetR39_1: R39.1 U15.22 | length 639.4
  Top Layer w8: R39.1@879.53,1195 879.53,1230.53 v1(879.53,1357) ; v1(1253,1357) 1267.2,1342.8 U15.22@1267.2,1294.45
  Top Layer w10: R39.1@879.53,1195 879.53,1230.53
  Bottom Layer w8: v1(879.53,1357) v1(1253,1357)
NetR41_2: R41.2 U16.4 | length 932.5
  Top Layer w8: v1(6360,2395) 6355,2400 6360,2400 v1@6360,2405
  Top Layer w20: v1@6359.29,2409.29 6358,2410.57 6358,2428.8 6369.57,2440.36 U16.4@6369.57,2504.17 ; R41.2@6549.53,2840 6610,2840 6660,2790 v1(6660,2450)
  Bottom Layer w20: v1(6360,2395) 6355,2400 6360,2400 6360,2405 6370,2395 6605,2395 v1(6660,2450)
NetR42_1: R42.1 U16.28 | length 97.3
  Top Layer w8: 6279.05,2728.58 U16.28@6292.8,2728.58
  Top Layer w20: R42.1@6220,2669.53 6279.05,2728.58
NetR48_2: R48.2 U18.27 | length 106.3
  Top Layer w8: R48.2@7005,3420 7024,3420 7035.47,3431.47 U18.27@7035.47,3502.56
NetR49_2: R49.2 U17.27 | length 173.9
  Top Layer w8: U17.27@1497.44,3530.47 1547.94,3530.47 1582.47,3565 1603.43,3565 1616.28,3577.84 1629.53,3577.84 R49.2@1629.53,3600
NetR50_2: R50.2 U19.27 | length 129.1
  Top Layer w8: R50.2@2080,3469.53 2080,3495 2090.16,3505.16 2090.47,3505.47 U19.27@2090.47,3542.56
  Top Layer w10: 2080,3495 2090.16,3505.16 U19.27@2090.16,3542.56
NetR51_2: R51.2 U20.27 | length 77.4
  Top Layer w8: R51.2@4290,3464.53 4300.47,3475 U20.27@4300.47,3537.56
RESET: D3.1 J1.10 R9.1 SW1.1 U5.64 U5.99 | length 5752.2
  Top Layer w8: D3.1@1580,1070.47 1622.47,1070.47 1672,1120 1672,1433.5 1896.5,1658 1896.5,1772.14 1878.5,1790.14 1705.86,1790.14 1672,1824 1672,2150 v1(1656,2166) ; J1.10@3348.11,2439.21 3464,2439.21 ; v1(3428.47,2238) R9.1@3605.47,2415 3605.47,2386.56 3622.75,2369.28 3809.28,2369.28 ; v1(3855,2435) 3855,2421 3858,2418 3809.28,2369.28 ; U5.99@4081.77,2303.46 3946.54,2303.46 3880.72,2369.28 3809.28,2369.28 ; v1(4351,2880) 4360.32,2870.68 U5.64@4360.32,2818.23
  Top Layer w10: SW1.1@1431.42,768.9 1431.42,948.42 1553.47,1070.47 D3.1@1580,1070.47 ; 3464,2439.21 3488.21,2415 R9.1@3605.47,2415
  Bottom Layer w8: v1(1656,2166) 1728,2238 v1(3428.47,2238) ; v1(3855,2435) 3855,2421 3858,2418 3955.36,2418 4027.26,2489.91 4250.91,2489.91 4260.5,2499.5 4323.5,2499.5 4351,2527 v1(4351,2880)
SEL_LED_0: U1.31 U5.29 | length 4016.8
  Top Layer w8: U1.31@1500.2,1911.46 1526.46,1911.46 1535,1920 1535,2122 1625,2212 1666,2212 1745,2133 v1(1745,1896) ; v1(4565,2355) 4577.17,2342.83 U5.29@4678.23,2342.83
  Bottom Layer w8: v1(1745,1896) 1841,1992 4002,1992 4183.5,2173.5 4183.5,2358 4192,2366.5 4294.5,2366.5 4304.5,2376.5 4391.13,2376.5 4407.82,2359.81 4477.18,2359.81 4483.37,2366 4530.41,2366 4541.41,2355 v1(4565,2355)
SEL_LED_1: U3.31 U5.25 | length 3879.7
  Top Layer w8: v1(1979,1472) 1990,1461 2021.82,1461 2050.32,1432.5 2089.68,1432.5 2125.18,1468 2176,1468 2185.79,1458.21 U3.31@2185.79,1437.44 ; U5.25@4616.22,2221.77 4616.22,2195.03 4629.55,2195.03 4648.58,2176 4648.58,2069.64 4713,2005.22 v1(4713,1623)
  Bottom Layer w8: v1(1979,1472) 2034,1417 3382.92,1417 3415.92,1450 3526.59,1450 3562.59,1414 4672,1414 4713,1455 v1(4713,1623)
SEL_LED_2: U4.31 U5.23 | length 1856.6
  Top Layer w8: U4.31@3423.54,1442.44 3423.54,1483.54 v1(3440,1500) ; U5.23@4576.85,2221.77 4576.85,2150 v1(4588,2138.85) ; v1(4585,1655) 4575,1655 4588,1668 v1(4588,1842)
  Bottom Layer w8: v1@3440,1495 3548.31,1495 3556.78,1486.53 3581.22,1486.53 3589.69,1495 3842,1495 4000,1653 v1@4573,1653 ; v1(4588,1842) v1(4588,2138.85)
SEL_LED_3: U2.31 U5.72 | length 2503.3
  Top Layer w8: U5.72@4202.83,2818.23 4202.83,2684.17 4220,2667 4220,2344 v1(4213,2337) ; v1(4304,1722) 4537,1489 4756.03,1489 4773.03,1472 U2.31@4773.03,1444.68
  Bottom Layer w8: v1(4213,2337) 4213,2033 4352,1894 4437,1894 4473.5,1930.5 4473.5,2104.5 4501,2132 4513,2132 4533,2112 4533,1888 4367,1722 v1(4304,1722)
SEL_LED_4: U5.74 U17.31 | length 3338.6
  Top Layer w8: U17.31@1497.44,3609.21 1515.21,3609.21 1528.69,3622.69 1528.69,3632 1558.69,3662 1680,3662 1759,3583 v1(1759,3326) ; v1(4068,2976) 4068,2831.78 4128,2771.78 4155,2771.78 4163.46,2780.24 U5.74@4163.46,2818.23
  Bottom Layer w8: v1(1759,3326) 1826,3259 2330.74,3259 2549.74,3040 4004,3040 v1(4068,2976)
SEL_LED_5: U5.19 U19.31 | length 4218
  Top Layer w8: U19.31@2169.21,3542.56 2169.21,3520.79 2190,3500 2265,3500 v1(2280,3515) ; v1(2513,3513) 2780,3246 v1(2780,1862) ; U5.19@4498.11,2221.77 4498.11,2093.89 v1(4503,2089)
  Bottom Layer w8: v1(2280,3515) 2289.5,3505.5 2505.5,3505.5 v1(2513,3513) ; v1(2780,1862) 4476,1862 4503,1889 v1(4503,2089)
SEL_LED_6: U5.66 U20.31 | length 1057.9
  Top Layer w8: U5.66@4320.94,2818.23 4320.94,3067.94 4564.5,3311.5 4564.5,3452.5 4526,3491 4389.21,3491 4379.21,3501 U20.31@4379.21,3537.56
  Top Layer w10: U5.66@4320.94,2818.23 4320.94,2899.06
SEL_LED_7: U5.70 U18.31 | length 4129.4
  Top Layer w8: U5.70@4242.2,2818.23 4242.2,2967.2 v1(4248,2973) ; U18.31@7114.21,3502.56 7114.21,3474 7148.21,3440 v1@7335,3440 ; v1(7305,3200) 7305,3285 7320,3300 v1(7330,3300)
  Top Layer w10: U5.70@4242.2,2818.23 4242.2,2902.8
  Bottom Layer w8: v1(4248,2973) 4263.5,2957.5 5469.5,2957.5 5594,2833 5692,2833 5899,3040 7257,3040 7305,3088 v1(7305,3200) ; v1(7330,3300) 7335,3305 7335,3425 7315,3445 v1(7335,3445)
SEL_LED_8: U5.92 U6.31 | length 3245.5
  Top Layer w8: U6.31@1462.44,2869.21 1484.21,2869.21 1489.21,2869.21 1500,2880 1500,2885 1500,3010 v1(1529,3039) ; U5.92@4081.77,2441.26 4128,2441.26 4142,2455.26 4142,2536.59 v1(4174,2568.59)
  Bottom Layer w8: v1(1529,3039) 2468,3039 2651,2856 3886.59,2856 3998.8,2743.8 v1(4174,2568.59)
SEL_LED_9: U5.10 U8.31 | length 4521.9
  Top Layer w8: U8.31@3149.21,3597.56 3149.21,3576 3160.21,3565 v1(3290,3565) ; U5.10@4320.94,2221.77 4320.94,2275.94 4414.31,2369.31 v1(4435,2389.31) ; v1(4963,2274) v1(4963,3156)
  Bottom Layer w8: v1(3290,3565) 3155,3565 2950,3360 2950,3218 3012,3156 v1(4963,3156) ; v1(4435,2389.31) 4435,2435 4449.5,2449.5 4513.78,2449.5 4553.78,2409.5 4620,2409.5 4738,2291.5 4945.5,2291.5 v1(4963,2274)
SEL_LED_10: U5.12 U9.31 | length 2797.2
  Top Layer w8: v1(4360.32,2152.32) U5.12@4360.32,2221.77 ; v1(4917,2258) 4933,2274 v1(4933,3393) ; v1(5694.21,3485) U9.31@5694.21,3527.56
  Bottom Layer w8: v1(4360.32,2152.32) 4450,2242 4450,2310 4490,2350 4523.78,2350 4552.78,2321 4587,2321 4683.5,2224.5 4883.5,2224.5 v1(4917,2258) ; v1(4933,3393) 5602.21,3393 v1(5694.21,3485)
SEL_LED_11: U5.95 U7.31 | length 7354.2
  Top Layer w8: v1(2980,3338) 2980,2207 v1(3082,2105) ; v1(4005,2345) 4025,2365 4025,2375 4032.2,2382.2 U5.95@4081.77,2382.2 ; v1(7580,3430) 7580,3584 7589.23,3593.23 U7.31@7612.09,3593.23
  Bottom Layer w8: v1(2980,3338) 3088,3230 7450,3230 7580,3360 v1(7580,3430) ; v1(3082,2105) 3765,2105 v1(4005,2345)
SEL_LED_12: U5.24 U10.31 | length 1919.4
  Top Layer w8: U5.24@4596.54,2221.77 4596.54,2183.46 4618,2162 v1(4618,2098) ; v1(6035,1590) 6030,1595 6030,1599.21 6033.42,1595.79 6050.79,1595.79 U10.31@6050.79,1537.44
  Bottom Layer w8: v1(4618,2098) 4696.5,2176.5 5025.5,2176.5 5602.79,1599.21 6030,1599.21 6030,1595 v1(6035,1590)
SEL_LED_13: U5.22 U12.31 | length 3523.2
  Top Layer w8: v1(4505,2315) 4557.17,2262.83 U5.22@4557.17,2221.77 ; v1(6910,1535) 6950,1495 7092.79,1495 7115.79,1472 U12.31@7115.79,1452.44
  Bottom Layer w8: v1(4505,2315) 4611.5,2208.5 5074.5,2208.5 5112,2246 5536,2246 5545,2237 5545,2192 5422,2069 5422,1855 5486,1791 6654,1791 v1(6910,1535)
SEL_LED_14: U5.73 U13.31 | length 4683.5
  Top Layer w8: U5.73@4183.15,2818.23 4183.15,2863.15 4195,2875 4205,2875 4224,2894 4225.2,2894 ; 4226,2894 4226,2941 4208,2959 4208,2985 4230,3007 v1(4230,3084) ; v1@7147.5,3097.5 7224,3021 7224,2643.37 7235,2632.37 7235,1905 v1(7245,1905) ; v1(7390,1905) 7404.21,1890.79 U13.31@7442.56,1890.79
  Bottom Layer w8: v1(4230,3084) 5148.28,3084 5149.78,3085.5 5174.22,3085.5 5175.72,3084 7134,3084 v1(7155,3105) ; v1(7245,1905) v1(7390,1905)
SEL_LED_15: U5.75 U11.31 | length 4113.2
  Top Layer w8: v1(4097.5,3018.5) 4097.5,2958.5 4143.78,2912.22 U5.75@4143.78,2818.23 ; v1(7225,3075) 7255,3045 v1(7255,2695) ; v1(7460,2695) 7469.21,2685.79 U11.31@7522.56,2685.79
  Top Layer w10: U5.75@4143.78,2818.23 4143.78,2876.22
  Bottom Layer w8: v1(4097.5,3018.5) 5017.85,3018.5 5043.26,2993.08 5158.08,2993.08 5224,3059 7209,3059 v1(7225,3075) ; v1(7255,2695) v1(7460,2695)
SEL_LED_MODE: U5.96
SPI_CLK: U1.32 U2.32 U3.32 U4.32 U6.32 U7.32 U8.32 U9.32 U17.32 U18.32 U19.32 U20.32 | length 16273.6
  Top Layer w8: U6.32@1462.44,2888.9 1462.44,3022.56 1453.5,3031.5 1453.5,3085.19 1496,3127.69 v1(1496,3319) ; 1497.44,3657.44 U17.32@1497.44,3628.9 U17.32@1500,3628.9 ; U1.32@1500.2,1931.14 1508,1931.14 1508,2138 1613.5,2243.5 1671.5,2243.5 1912.5,2002.5 1912.5,1633.5 1817,1538 1817,1472 1854.5,1434.5 1973.98,1434.5 ; 2114.3,1434.5 2096.3,1416.5 ; U3.32@2166.1,1437.44 2117.24,1437.44 2096.3,1416.5 ; U19.32@2188.9,3547 U19.32@2188.9,3542.56 2190.84,3544.5 2325.5,3544.5 2335,3535 v1(2335,3455) 2335,3358.28 2137,3160.28 2137,1789 v1(2288,1638) 1984,1638 1948.54,1602.54 1948.54,1459.94 1973.98,1434.5 ; U8.32@3168.9,3597.56 3168.9,3598 3282,3598 3284,3600 v1(3360,3600) ; v1(3295,1450) 3344,1450 3350,1444 3403.86,1444 U4.32@3403.86,1442.44 ; U20.32@4398.9,3537.56 4472.44,3537.56 4485,3525 v1(4520,3525) ; v1(4635,1455) 4663,1455 4667,1451 4753.35,1451 U2.32@4753.35,1444.68 ; U9.32@5713.9,3527.56 5713.9,3519.83 v1(5756.72,3477) ; U18.32@7133.9,3502.56 7133.9,3477 v1(7260,3477) ; v1(7285,2500) 7285,3121 7334.5,3170.5 7334.5,3259.5 7390,3315 7506.72,3315 7609.5,3417.78 7609.5,3469.5 v1(7620,3480) 7620,3546.62 7610,3556.62 7610,3571.45 U7.32@7612.09,3573.54 ; 1973.98,1434.5 2025.7,1434.5 2043.7,1416.5 2096.3,1416.5
  Bottom Layer w8: v1@1500,3323 1500,3655 1700,3455 v1(2335,3455) 2924,3455 3063,3594 3187.28,3594 3193.28,3600 v1(3360,3600) 3510,3450 4445,3450 v1(4520,3525) 4681.5,3363.5 5643.22,3363.5 v1(5756.72,3477) v1(7260,3477) 7268,3485 7615,3485 v1(7620,3480) ; v1(2288,1638) 2482,1444 3387.29,1444 3413.29,1470 3529.22,1470 3548.22,1451 v1@4635,1451 ; v1(4635,1455) v1@4639,1451
  other v1: 1510,3670
SPI_MISO: R10.2 U5.30 | length 656.7
  Top Layer w8: v1(4495,2415) 4525,2385 4607.52,2385 4630,2362.52 U5.30@4678.23,2362.52 ; v1(4830,2262) 4830,2280.47 R10.2@4849.53,2300
  Bottom Layer w8: v1(4495,2415) 4525,2385 4621.72,2385 4639.5,2367.22 4639.5,2354.81 4732.31,2262 v1(4830,2262)
SPI_MOSI: R11.2 U1.1 U2.1 U3.1 U4.1 U5.31 U6.1 U7.1 U8.1 U9.1 U10.1 U11.1 U12.1 U13.1 U17.1 U18.1 U19.1 U20.1 | length 26281.7
  Top Layer w8: v1(1414,3051) 1433.9,3031.1 U6.1@1433.9,2917.44 ; U17.1@1468.9,3657.44 1468.9,3680.9 1488,3700 1760,3700 1789,3671 1789,2540 1471.65,2222.65 U1.1@1471.65,1959.68 ; U3.1@2137.56,1408.9 2111.33,1408.9 2102.93,1400.5 2076.6,1400.5 1838,1161.9 1838,800 1876,762 2144,762 2170,736 2170,704 2204,670 3072,670 ; v1(2167,3108) 2341.72,3282.72 ; U19.1@2217.44,3571.1 v1@2702.9,3571.1 ; 2354.45,3570.55 2370,3555 2370,3311 2341.72,3282.72 ; U8.1@3197.44,3626.1 3236.1,3626.1 3415,3805 v1(3415,3820) ; U4.1@3375.32,1413.9 3330,1413.9 3078.47,1162.37 3078.47,993.53 3102,970 3150,970 3170,950 3170,870 3125,825 3040,825 ; U20.1@4427.44,3566.1 v1(4719.9,3566.1) 4757.9,3566.1 v1(4867.5,3456.5) ; U2.1@4724.8,1416.14 4473.14,1416.14 4345,1288 4345,863 4152,670 ; R11.2@4790.47,2380 4790.47,2363.15 4768,2363.15 4760,2355.15 4760,2275 4807,2228 4848,2228 4886,2266 4886,2676.79 4901.31,2692.1 4901.31,3423.69 v1@4868,3457 ; v1(5410,1325) 5420,1315 5420,805 5285,670 4152,670 ; U9.1@5742.44,3556.1 5758.9,3556.1 v1(5785,3530) ; v1(5925,1510) 5926.1,1508.9 U10.1@6002.56,1508.9 ; v1@6905,1420 v1(6908.9,1423.9) U12.1@7067.56,1423.9 ; U18.1@7162.44,3531.1 v1(7252.1,3521.1) ; v1(7470,1795) 7471.1,1796.1 U13.1@7471.1,1842.56 ; U11.1@7551.1,2637.56 7550,2636.46 7550,2600 7580,2570 v1(7600,2570) ; U7.1@7640.63,3545 7640.63,3517.37 7660,3498 v1@7660,3445 ; 2341.72,3282.72 2341.72,1639.28 3040,941 3040,825 ; 3040,825 3040,702 3072,670 ; 3072,670 4152,670
  Top Layer w10: U5.31@4678.23,2382.2 4788.27,2382.2 R11.2@4790.47,2380
  Bottom Layer w8: v1(1414,3051) 1413.91,3051.09 1413.91,3080 1433.91,3100 1510,3100 1525,3085 v1(1790,3085) 2140,3085 2163,3108 v1(2167,3108) ; v1(2703,3571) 2952,3820 v1(3415,3820) 3879,3820 4232.5,3466.5 4264.5,3466.5 4343,3545 4420,3545 4441.1,3566.1 v1(4719.9,3566.1) ; v1(4867.5,3456.5) 5577.5,3456.5 5653.44,3532.44 5864.56,3522.44 v1(7252.1,3521.1) 7258.2,3525 7635,3525 7675,3485 7675,3460 7660,3445 v1(7660,3450) 7660,3060 7800,2920 7800,2650 7720,2570 ; v1(5410,1325) 5465,1380 5465,1505 5485,1525 5910,1525 v1(5925,1510) 5931.74,1516.74 6236.74,1516.74 6265,1545 6787.8,1545 v1(6908.9,1423.9) ; v1(7470,1795) 7525,1740 7635,1740 7720,1825 7720,2570 ; v1(7600,2570) 7720,2570
SPI_SCK: U5.28 U10.32 U11.32 U12.32 U13.32 | length 4973.8
  Top Layer w8: U5.28@4678.23,2323.15 4719.48,2323.15 4741,2301.63 4741,2260.38 4840,2161.38 v1(4840,2140) ; v1(5950,1565) 5995,1565 6022.56,1537.44 U10.32@6031.1,1537.44 ; v1(6970,1460) 7088.54,1460 U12.32@7096.1,1452.44 ; v1(7365,2500) 7450,2500 7522.56,2572.56 U11.32@7522.56,2666.1 ; v1(7410,1775) 7440.5,1805.5 7440.5,1869.04 U13.32@7442.56,1871.1
  Bottom Layer w8: v1(4840,2140) 5039.37,2140 5596.16,1583.21 5931.79,1583.21 v1(5950,1565) 5965,1550 6240,1550 6255,1565 6795,1565 6900,1460 v1(6970,1460) 6996,1460 7010,1474 7246,1474 7265,1455 7430,1455 7440,1465 7440,1745 v1(7410,1775) 7430,1795 7430,1950 7335,2045 7335,2500
  Bottom Layer w10: 7285,2500 7335,2500 v1(7365,2500)
TILE_0: P20.1 P20.2 P20.3 P20.4 P20.5 R27.1 U14.9 | length 6036.7
  Top Layer w8: v1(5162,3056) 5307.53,2910.47 R27.1@5360,2910.47 ; U14.9@5395,2735.04 5395,2784
  Top Layer w10: P20.5@620,3780 P20.4@620,3880 P20.3@620,3980 P20.2@620,4080 P20.1@620,4180 ; v1@5161.47,3056 v1@5161.74,3055.74 ; R27.1@5360,2910.47 5360,2840 5395,2805 5395,2784 U14.9@5395,2735.04
  Bottom Layer w8: P20.5@620,3780 889,3511 899,3318 1082,3318 1175,3225 1561,3225 1707,3371 2360,3371 2675,3056 4140,3056 5089,3056 ; 5089,3056 v1(5162,3056) 5089,3056
TILE_1: P24.1 P24.2 P24.3 P24.4 P24.5 R30.1 U14.8 | length 5120.7
  Top Layer w8: 5420,2860 R30.1@5420,2910.47 ; U14.8@5445,2735.04 5445,2810
  Top Layer w10: v1(4655,4375) 4655,4228.28 5100,3783.28 5100,3216 5321,2995 5321,2950 5331,2940 5393,2940 5422.53,2910.47 R30.1@5420,2910.47 ; 5420,2860 5420,2835 5445,2810
  Bottom Layer w8: P24.1@1960,4420 2005,4375 v1(4655,4375)
  Bottom Layer w10: P24.5@1560,4420 P24.4@1660,4420 P24.3@1760,4420 P24.2@1860,4420 P24.1@1960,4420
TILE_2: P27.1 P27.2 P27.3 P27.4 P27.5 R35.1 U14.7 | length 3029.9
  Top Layer w8: P27.1@4520,4420 4565,4375 ; 5060,3775 5065,3770 5065,3200 5120,3145 v1(5120,2765) ; v1(5460,2640) 5495,2675 U14.7@5495,2735.04 5495,2815 ; R35.1@5476,2910.47 R35.1@5480,2910.47
  Top Layer w10: 4565,4375 4565,4270 5060,3775 ; R35.1@5480,2910.47 5480,2830 5495,2815 ; 5495,2696 U14.7@5495,2735.04
  Bottom Layer w8: v1(5120,2765) 5125,2765 5250,2640 5357.28,2640 5357.78,2640.5 5459.5,2640.5 v1(5460,2640)
  Bottom Layer w10: P27.5@4120,4420 P27.4@4220,4420 P27.3@4320,4420 P27.2@4420,4420 P27.1@4520,4420
TILE_3: P29.1 P29.2 P29.3 P29.4 P29.5 R37.1 U14.6 | length 3117.4
  Top Layer w8: R37.1@5540,2910.47 5545,2905.47 v1(5545,2830) U14.6@5545,2735.04 ; v1(5921,2991) 6094,3164 6094,4000 6126,4032 6517,4032 P29.5@6905,4420
  Top Layer w10: v1@5545,2820 v1(5545,2830)
  Bottom Layer w8: v1(5545,2830) 5571,2804 5734,2804 v1(5921,2991)
  Bottom Layer w10: P29.5@6905,4420 P29.4@7005,4420 P29.3@7105,4420 P29.2@7205,4420 P29.1@7305,4420
TILE_4: P14.1 P14.2 P14.3 P14.4 P14.5 R21.1 U14.5 | length 6002.2
  Top Layer w8: v1(5560,2630) 5560,2661 5595,2696 U14.5@5595,2735.04
  Top Layer w10: P14.5@620,2740 P14.4@620,2840 P14.3@620,2940 P14.2@620,3040 P14.1@620,3140 ; U14.5@5595,2735.04 5595,2820 5600,2825 R21.1@5600,2910.47
  Bottom Layer w8: P14.1@620,3140 680,3200 810,3200 892.91,3117.09 2114.49,3117.09 2136.04,3138.64 2411.66,3138.64 2626.3,2924 4148.79,2924 4166.29,2941.5 5371.13,2941.5 5560,2752.63 v1(5560,2630)
TILE_5: P16.1 P16.2 P16.3 P16.4 P16.5 R23.1 U14.4 | length 4236.2
  Top Layer w8: P16.1@3300,4410 P16.1@3300,4420 3700,4020 v1(3700,3955) ; v1(3600,3855) 3600,3354 v1(3950,3004) ; U14.4@5645,2735.04 5645,2815 ; R23.1@5645,2910.47 5659,2910.47 R23.1@5660,2910.47 v1(5660,2863)
  Top Layer w10: 5645,2815 5660,2830 v1(5660,2863) ; v1@5659,2864 R23.1@5659,2910.47
  Bottom Layer w8: v1(3600,3855) v1(3700,3955) ; v1(3950,3004) 4007.74,2946.26 4146.26,2946.26 4202.5,3002.5 4267,3002.5 4292.42,2977.08 5545.92,2977.08 v1(5660,2863)
  Bottom Layer w10: P16.5@2900,4420 P16.4@3000,4420 P16.3@3100,4420 P16.2@3200,4420 P16.1@3300,4420
TILE_6: P18.1 P18.2 P18.3 P18.4 P18.5 R25.1 U14.3 | length 2382.3
  Top Layer w8: U14.3@5695,2735.04 5695,2810 ; R25.1@5720,2901 5756,2937 5821,2937 6078,3194 6078,4177 P18.1@5835,4420
  Top Layer w10: 5695,2810 5720,2835 R25.1@5720,2901
  Bottom Layer w10: P18.5@5435,4420 P18.4@5535,4420 P18.3@5635,4420 P18.2@5735,4420 P18.1@5835,4420
TILE_7: P21.1 P21.2 P21.3 P21.4 P21.5 R28.1 U14.2 | length 3878.3
  Top Layer w8: U14.2@5745,2735.04 5745,2805 5745,2875.47 R28.1@5780,2910.47 5900.47,2910.47 v1(5994,3004) ; v1(7635,3023) 7635,3032.63 7890.37,3288 8213,3288 v1(8215,3290) ; v1(8325,3340) 8320,3340 8380,3400 P21.1@8380,3680
  Top Layer w10: U14.2@5745,2735.04 5745,2805 5780,2840 R28.1@5780,2910.47 ; P21.1@8380,3680 P21.2@8380,3780 P21.3@8380,3880 P21.4@8380,3980 P21.5@8380,4080
  Bottom Layer w8: v1(5994,3004) 6013,3023 v1(7635,3023) ; v1(8215,3290) 8275,3290 v1(8325,3340)
TILE_8: P23.1 P23.2 P23.3 P23.4 P23.5 R31.1 U14.23 | length 6291.6
  Top Layer w8: 5745,2298 U14.23@5745,2364.96
  Top Layer w10: P23.5@620,1600 P23.4@620,1700 P23.3@620,1800 P23.2@620,1900 P23.1@620,2000 ; v1(5685,2054) 5733,2054 5759,2080 5759,2105.47 R31.1@5785,2105.47 ; v1(5745,2269) 5745,2298
  Bottom Layer w8: P23.1@620,2000 690,2070 3792.87,2070 4137.37,2414.5 4249.09,2414.5 4302.09,2467.5 4412.5,2467.5 4435,2490 4528.28,2490 4546.78,2471.5 4640,2471.5 4804,2307.5 5706.5,2307.5 v1(5745,2269)
  Bottom Layer w10: v1(5685,2054) 5745,2114 v1(5745,2269)
TILE_9: P25.1 P25.2 P25.3 P25.4 P25.5 R32.1 U14.22 | length 7400.8
  Top Layer w8: v1(5237,575) 5450,788 5450,1337 5198,1589 5198,2533.6 5245.71,2581.31 ; 5528.96,2593.5 5529.96,2594.5 v1(5765.5,2594.5) ; U14.22@5695,2364.96 5695,2503 v1(5695,2506) ; R32.1@5725,2105.47 R32.1@5733,2105.47 ; 5762.53,2135 5810,2135 5860,2185 5860,2410 5855.5,2414.5 5855.5,2447.22 5860,2451.72 5860,2500 v1(5875,2515)
  Top Layer w10: 5245.71,2581.31 5257.4,2593 5322.04,2593 5322.54,2593.5 5344.37,2593.5 5357.37,2580.5 5382.63,2580.5 5395.63,2593.5 5528.96,2593.5 ; v1@5695,2503 5739,2547 5786.04,2547 5812,2572.96 5812,2690.38 5819.81,2698.19 5819.81,2771.89 5805.28,2786.43 5784.72,2786.43 5770.19,2771.89 5770.19,2698.19 5778,2690.38 v1@5778,2587.04 ; R32.1@5733,2105.47 5733,2120 5748,2135 5762.53,2135
  Bottom Layer w8: P25.5@2420,620 2465,575 v1(5237,575) ; v1(5695,2506) v1@5704,2515 ; v1(5765.5,2594.5) 5788.5,2571.5 5818.5,2571.5 v1(5875,2515)
  Bottom Layer w10: P25.1@2020,620 P25.2@2120,620 P25.3@2220,620 P25.4@2320,620 P25.5@2420,620
TILE_10: P28.1 P28.2 P28.3 P28.4 P28.5 R36.1 U14.21 | length 6301.2
  Top Layer w8: v1(5635,2465) 5635,2453 5645,2443 U14.21@5645,2364.96 ; v1(5645,690) 5862,907 5862,2040 5862,2164.37 5876,2178.37 5876,2391 5885,2400 v1@5885,2434
  Top Layer w10: v1(5645,690) 5645,2020 ; R36.1@5665,2105.47 5665,2090 5645,2070 5645,2020 ; 5862,2040 5819,1997 5668,1997 5645,2020
  Bottom Layer w8: P28.5@3680,620 3729,669 5306.54,669 5352.17,714.63 5620.37,714.63 v1(5645,690) ; v1(5635,2465) 5635,2453 5655,2433 5862,2433 5864,2435 v1(5885,2435)
  Bottom Layer w10: P28.1@3280,620 P28.2@3380,620 P28.3@3480,620 P28.4@3580,620 P28.5@3680,620
TILE_11: P15.1 P15.2 P15.3 P15.4 P15.5 R22.1 U14.20 | length 2742.7
  Top Layer w10: P15.5@5040,620 5129,531 5328.35,531 5602,804.65 v1(5602,2052) 5602,2105.47 R22.1@5605,2105.47 ; v1(5582,2214) 5595,2227 U14.20@5595,2364.96
  Bottom Layer w10: P15.1@4640,620 P15.2@4740,620 P15.3@4840,620 P15.4@4940,620 P15.5@5040,620 ; v1(5582,2214) 5582,2072 v1(5602,2052)
TILE_12: P17.1 P17.2 P17.3 P17.4 P17.5 R24.1 U14.19 | length 3299.6
  Top Layer w8: v1(5403,685) 5544,826 5544,2105.47 R24.1@5545,2105.47
  Top Layer w10: R24.1@5545,2105.47 5545,2120 5530,2135 5340,2135 5329,2146 5329,2279 5339,2289 5520,2289 5545,2314 U14.19@5545,2364.96
  Bottom Layer w8: v1(5403,685) 5468,620 P17.1@6140,620
  Bottom Layer w10: P17.1@6140,620 P17.2@6240,620 P17.3@6340,620 P17.4@6440,620 P17.5@6540,620
TILE_13: P19.1 P19.2 P19.3 P19.4 P19.5 R26.1 U14.18 | length 5200
  Top Layer w8: R26.1@5485,2105.47 5492,2105.47 5492,2016 5492,1868 ; v1(5490,820) 5490,1306 5492,1308 5492,1868 ; U14.18@5495,2364.96 5495,2458 5534,2497 5534,2546 5503.5,2576.5 5476.5,2576.5 5463.5,2563.5 5251.94,2563.5 5216.44,2528 5216.44,2143.56 5376,1984 5492,1868 ; v1(7035,805) P19.1@7220,620
  Top Layer w10: 5376,1984 5460,1984 5492,2016 ; 5492,1625 5492,1868
  Bottom Layer w8: v1(5490,820) 5505,805 v1(7035,805)
  Bottom Layer w10: P19.1@7220,620 P19.2@7320,620 P19.3@7420,620 P19.4@7520,620 P19.5@7620,620
TILE_14: P22.1 P22.2 P22.3 P22.4 P22.5 pad.0 R29.1 U14.17 | length 4738.4
  Top Layer w8: R29.1@5425,2105.47 5452,2105.47 v1(5452,2044) ; v1(5430,2475) 5430,2452 5445,2437 U14.17@5445,2364.96 ; 7780,1315 8160,1315 P22.1@8380,1535
  Top Layer w10: pad.0@7120,1760 7640,1455 7780,1315 ; P22.1@8380,1535 P22.2@8380,1635 P22.3@8380,1735 P22.4@8380,1835 P22.5@8380,1935
  Bottom Layer w8: v1(5430,2475) 5430,2452 5489.4,2392.6 5744.4,2392.6 5785,2352 ; v1(5452,2044) 5529.08,2044 5561.56,2011.52 5708.48,2011.52 5785,2088.04 5785,2352 ; pad.0@7120,1760 7045,1835 6302,1835 5785,2352
TILE_15: P26.1 P26.2 P26.3 P26.4 P26.5 R33.1 U14.16 | length 4517.4
  Top Layer w8: U14.16@5395,2364.96 5395,2481.72 5450.28,2537 v1(5494,2537) v1@5479.7,2537 ; v1(7640,2970) 7670,3000 7670,3045 7897,3272 8065.63,3272 8188,3149.63 8188,2987 v1(8225,2950)
  Top Layer w10: R33.1@5365,2105.47 5320,2105.47 5307,2118.47 5307,2300 5318,2311 5380,2311 5395,2326 U14.16@5395,2364.96 ; P26.1@8380,2600 P26.2@8380,2700 P26.3@8380,2800 P26.4@8380,2900 P26.5@8380,3000
  Bottom Layer w8: v1(5494,2537) 5589.23,2537 6047.23,2995 6393,2995 6418,2970 v1(7640,2970) ; v1@8228,2945 8335,2945 P26.4@8380,2900
TILE_SENSE: U5.100 U14.1 | length 2884.7
  Top Layer w8: U5.100@4081.77,2283.78 4032,2283.78 4013,2264.78 4013,1926 4070.5,1868.5 4268.5,1868.5 v1@4346.5,1946.5 ; v1(5515.5,2216.5) 5571,2272 5571,2501 5634,2564 5779,2564 5795,2580 U14.1@5795,2735.04
  Bottom Layer w8: v1(4345,1945) 4360,1960 4360,2092.12 4460.38,2192.5 5491.5,2192.5 v1(5515.5,2216.5)
USB_CTS: U5.34 U15.11 | length 4349.8
  Top Layer w8: U15.11@1369.57,1025.55 1369.57,1059.57 ; v1(4565,2440) 4617,2440 ; 4619.74,2441.26 U5.34@4678.23,2441.26
  Top Layer w10: 1369.57,1059.57 1369.57,1084.57 1400,1115 v1(1425,1115)
  Bottom Layer w8: v1(1425,1115) 1609,1115 1646,1152 1646,1838.72 1817.89,2010.61 3804.11,2010.61 4176,2382.5 4268.5,2382.5 4278.5,2392.5 4369.87,2392.5 4442.87,2465.5 4521.63,2465.5 4545.13,2442 4563,2442 v1(4565,2440)
USBDM: J2.2 U15.16 | length 2293.7
  Top Layer w8: 1056.42,1356.42 1167.56,1356.42 1193,1381.85 ; J2.2@1128.5,780 v1(1128.5,839) ; v1(1420.75,1209) U15.16@1420.75,1294.45
  Top Layer w10: 1056.42,1356.42 995,1295 995,896.46 1071,820.46 1071,732.52 1128.5,732.52 J2.2@1128.5,780 ; 1193,1381.85 1231.65,1420.5 1299.47,1420.5 1323.98,1445.01 1323.98,1481.79 1360.5,1518.31 1410.66,1518.31 1479.53,1449.44 1479.53,1389.53 1420.75,1330.75 U15.16@1420.75,1294.45
  Bottom Layer w8: v1(1128.5,839) 1071,839 1042.5,867.5 1042.5,912.5 1339,1209 v1(1420.75,1209)
USBDP: J2.3 U15.15 | length 1874.7
  Top Layer w8: J2.3@1160,780 1160,702 1058,600 986,600 965,621 965,1290 1050,1375 1157.86,1375 1227.86,1445 1258.9,1445 1353.9,1540 1430,1540 1500,1470 1500,1348.11
  Top Layer w10: U15.15@1446.34,1294.45 1474.45,1294.45 1500,1320 1500,1348.11
V_USB: C47.2 D1.1 D2.1 R40.1 U5.6 U15.4 U15.17 | length 5025.8
  Top Layer w8: D1.1@746.5,1105 791.5,1060 795,1060 v1(800,1055) ; U15.4@1190.43,1025.55 1190.43,1105.53 ; v1(1190.43,1150) 1190.43,1105.53 ; R40.1@1380,1430.47 1439.53,1430.47 v1(1440,1430) ; 1395.16,1354 U15.17@1395.16,1294.45 1395.16,1240 1355.16,1200 1284.9,1200 1190.43,1105.53 ; U5.6@4242.2,2221.77 4242.2,2283.2 4289.9,2330.9 4289.9,2409.9 v1(4318,2438)
  Top Layer w10: D1.1@746.5,1105 D2.1@746.5,1185 ; U15.4@1190.43,1025.55 1190.43,960 1210.75,939.69 C47.2@1240,939.69 ; v1(1190.43,1150) v1@1190.43,1150.43 ; R40.1@1380,1430.47 1380,1369.16 1395.16,1354
  Bottom Layer w8: v1@800,1053 897,1150 v1(1190.43,1150) ; v1(1440,1430) 1625,1615 1625,1840.35 1827.65,2043 3804.5,2043 4160,2398.5 4261,2398.5 4300.5,2438 v1(4318,2438)
VBAT: C48.1 C49.1 J3.1 R41.1 U16.20 U16.21 U16.22 U16.23 U16.24 | length 1431
  Top Layer w8: 6439.74,2785.26 6446.34,2778.66 U16.22@6446.34,2728.58 ; 6440,3014.74 6439.74,3015 6450,3015 ; 6450,3010.32 6450,3015 ; 6455,3015 6450,3015 ; 6490.47,2890.16 C48.1@6500.32,2900
  Top Layer w10: U16.24@6395.16,2728.58 U16.23@6420.75,2728.58 U16.22@6446.34,2728.58 U16.21@6471.93,2728.58 U16.20@6497.52,2728.58
  Top Layer w20: 6450,3010.32 C49.1@6500.32,2960 C48.1@6500.32,2900 ; R41.1@6490.47,2840 6490.47,2890.16
  Top Layer w50: 6439.74,2785.26 6439.74,3015
  Top Layer w60: 6439.74,3015 J3.1@6439.74,3818.89
  Bottom Layer w8: J3.1@6440,3820 J3.1@6440,3840